# Altium PCB Power15V0_1A.PcbDoc
Units mm, origin at the board's own origin, x right, y up, seen from the top; angles counter-clockwise.
Board outline 93 x 54 mm, 2 copper layers (Top Layer, Bottom Layer); 39 components, 20 nets, 103 pads, 61 vias.
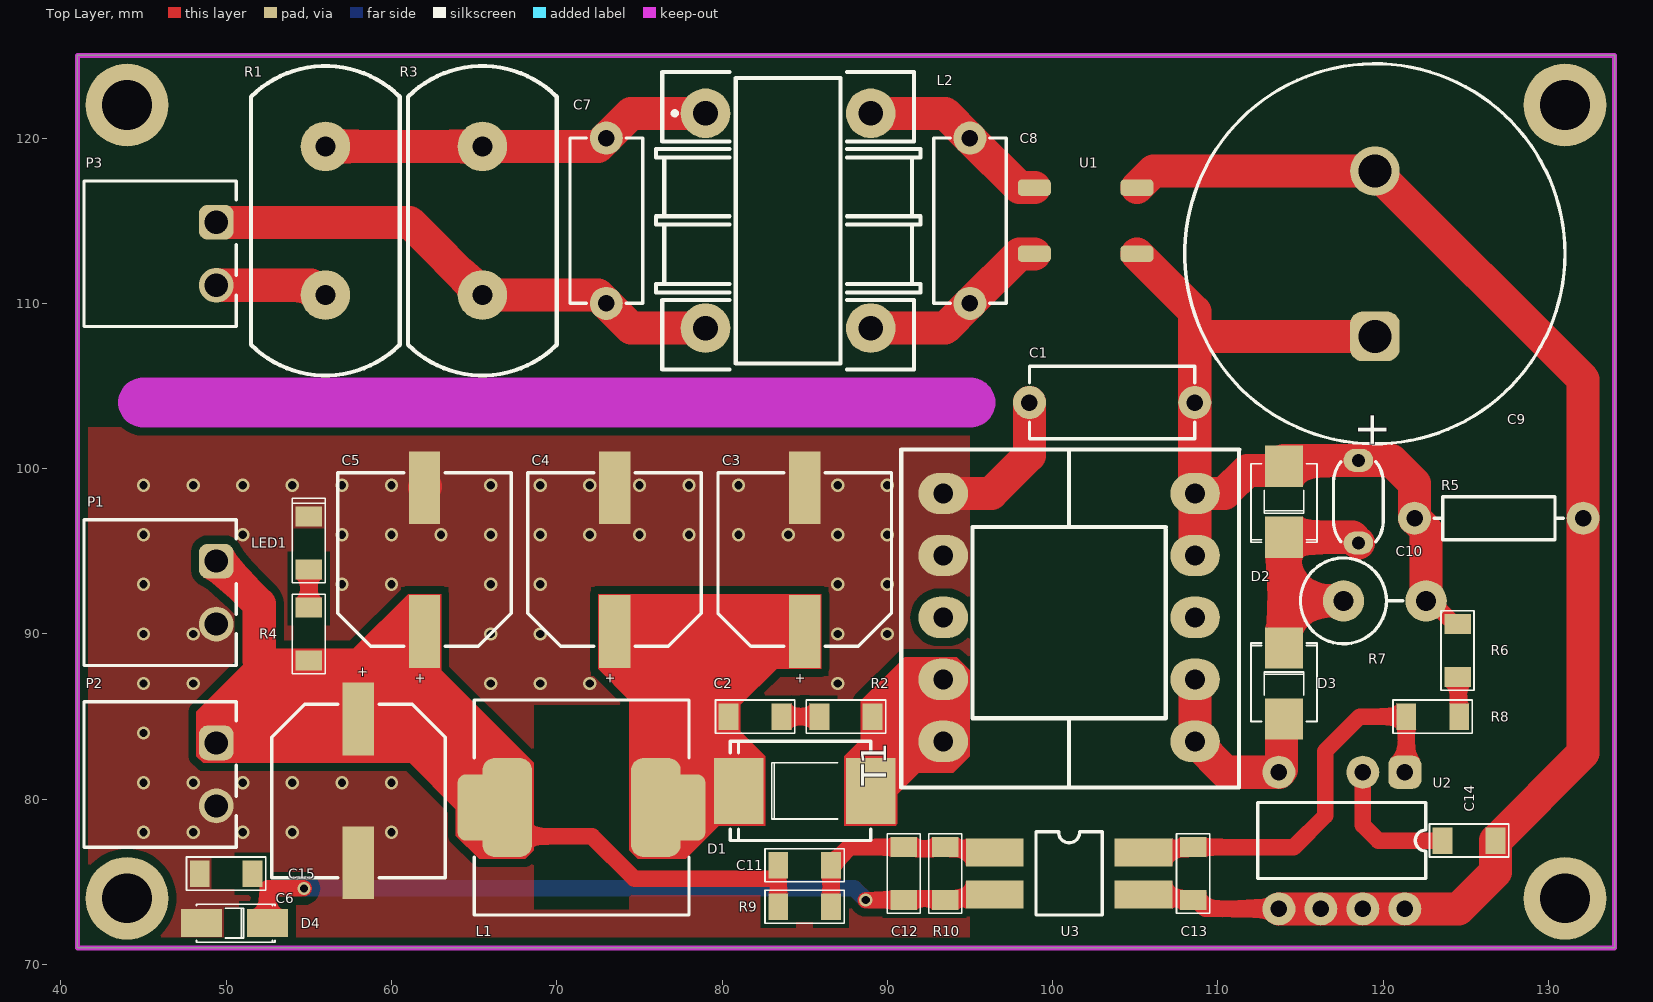
[diagram p0: Top Layer view]
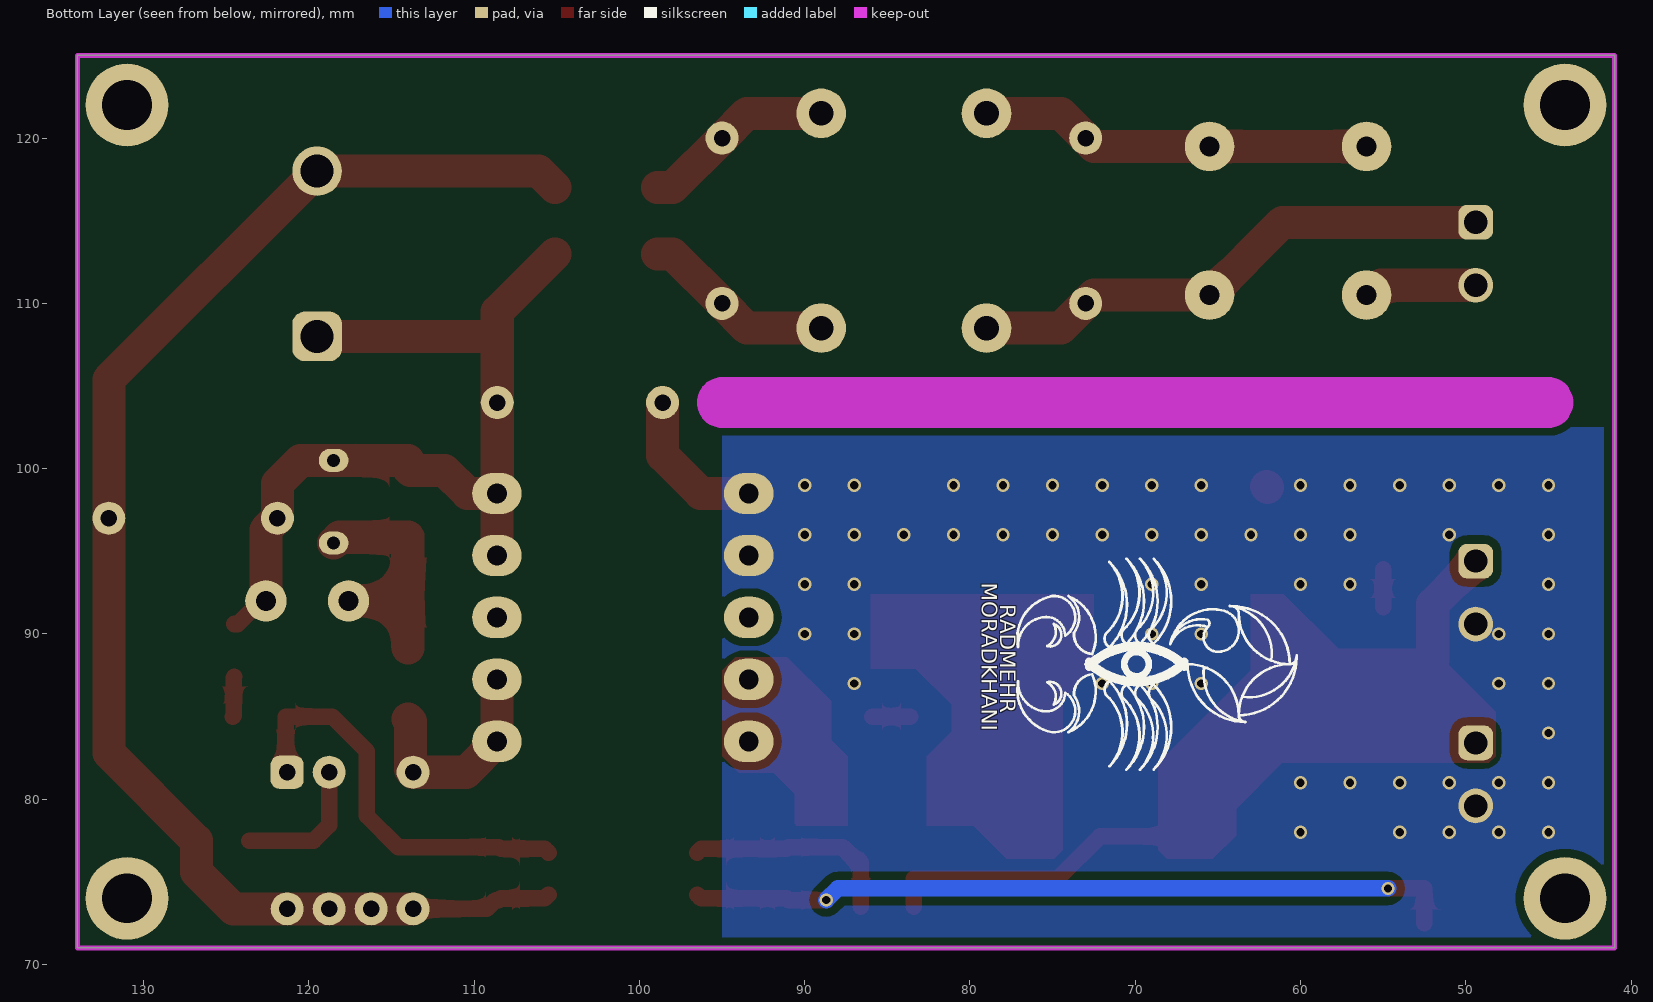
[diagram p1: Bottom Layer view, seen from below]
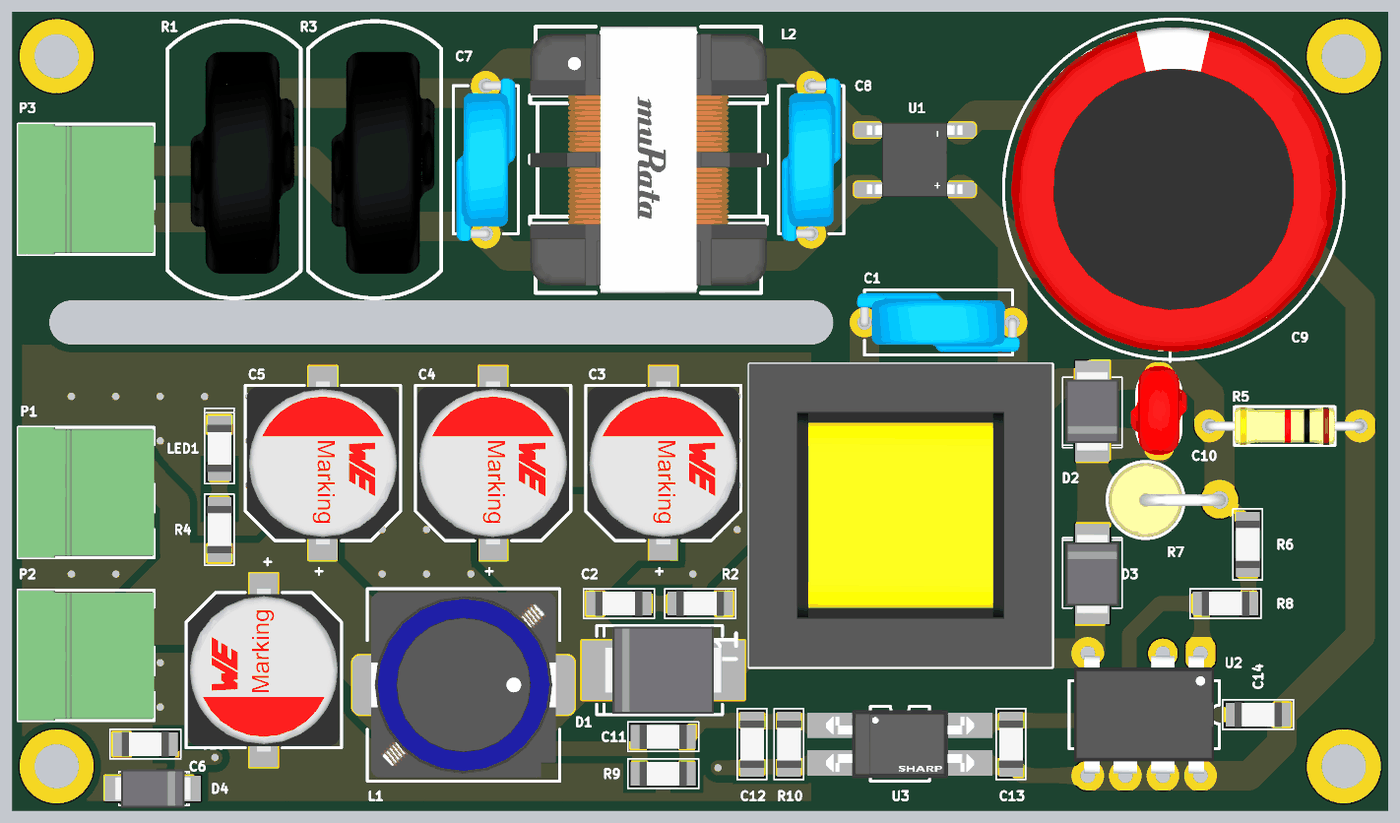
[diagram p2: 3D render of the assembled board from above, using the file's embedded part models]

## Layer stack, top to bottom
Top Solder: solder mask 0.0102, Solder Resist, Dk 3.5
Top Layer: signal copper 0.0356
Dielectric 1: dielectric 0.32, FR-4, Dk 4.8
Bottom Layer: signal copper 0.0356
Bottom Solder: solder mask 0.0102, Solder Resist, Dk 3.5

## Board outline
41,71 41,125 134,125 134,71
cut-out: 45,102.5 cw(c45,104) 45,105.5 95,105.5 cw(c95,104) 96.5,104 cw(c95,104) 95,102.5

## Design rules (kind name [scope] priority, off if disabled: settings)
Clearance [All] p1: gap=0.5 ignorepadtopadclearanceinfootprint=FALSE except(0: Arc-Hole Track-Hole SMDPad-Hole THPad-Hole Via-Hole Fill-Hole Poly-Hole Region-Hole Text-Hole)
PlaneConnect [All] p1: planeconnectstyle=Relief reliefexpansion=0.5 reliefentries=4 reliefconductorwidth=0.5 reliefairgap=0.5
PolygonConnect [All] p1: connectstyle=Direct reliefconductorwidth=1 reliefentries=4 polygonreliefangle="90 Angle" airgapwidth=1
RoutingVias [All] p1: holewidth=0.5 width=0.8 viastyle="Through Hole" minholewidth=0.5 minwidth=0.8 maxholewidth=0.5 maxwidth=0.8
SolderMaskExpansion [All] p1: expansion=0.102 istentingtop=FALSE
Width [All] p1: maxlimit=3 minlimit=1 preferedwidth=2 minimp=50.000000 maximp=50.000000 favimp=50.000000
29 further rules are at their usual default settings.

## Components (designator, comment, footprint, x,y, rotation, side; value= is the part's Value field where it differs from the comment)
C1 "CAP" CXY 103.6,104 r0 top
C2 "CAP_SMD" "C 1206" 82,85 r0 top
C3 "100µF" WCAP-AS5H_D10H10.5 85,94.5 r270 top
C4 "100µF" WCAP-AS5H_D10H10.5 73.5,94.5 r270 top
C5 "100µF" WCAP-AS5H_D10H10.5 62,94.5 r270 top
C6 "100µF" WCAP-AS5H_D10H10.5 58,80.5 r90 top
C7 "CAP" CXY 73,115 r90 top
C8 "CAP" CXY 95,115 r90 top
C9 "47µF" WCAP-AIG8_D22H26 119.5,113 r270 top
C10 "470nF" C_PLY_6X3 118.5,98 r90 top
C11 "CAP_SMD" "C 1206" 85,76 r0 top
C12 "CAP_SMD" "C 1206" 91,75.5 r270 top
C13 "CAP_SMD" "C 1206" 108.5,75.5 r90 top
C14 "CAP_SMD" "C 1206" 125.2,77.5 r180 top
C15 "CAP_SMD" "C 1206" 50,75.5 r180 top
D1 "DIOD_SMD" DIOD_SMC 85,80.5 r180 top
D2 "DIOD_SMD_ZENER" DIOD_SMB 114,98 r270 top
D3 "DIOD_SMD" DIOD_SMB 114,87 r90 top
D4 "DIOD_SMD_ZENER" DIOD_SMA 50.5,72.5 r0 top
L1 "Inductor" L_12*12_SMD 71.5,79.5 r180 top
L2 "EMI-FILTER" EMI-FILTER-10*13 84,115 r0 top
LED1 "LED_SMD" "D 1206" 55,95.5 r90 top
P1 "691322310002" 691322310002 46,92.5 r270 top
P2 "691322310002" 691322310002 46,81.5 r270 top
P3 "691322310002" 691322310002 46,113 r270 top
R1 "RTD" RTD 56,115 r90 top
R2 "RES_SMD" "R 1206" 87.5,85 r0 top
R3 "VARISTOR" RTD 65.5,115 r90 top
R4 "RES_SMD" "R 1206" 55,90 r270 top
R5 "10K" R025W_AX04 127,97 r180 top
R6 "RES_SMD" "R 1206" 124.5,89 r90 top
R7 "10K" R2W_AX_VER 120.1,92 r0 top
R8 "RES_SMD" "R 1206" 123,85 r0 top
R9 "RES_SMD" "R 1206" 85,73.5 r180 top
R10 "RES_SMD" "R 1206" 93.5,75.5 r90 top
T1 "EF20-10P" EF20-10P 101,91 r90 top
U1 "ABS210" ABS-4 102,115 r180 top
U2 "TNY2XX" PDIP-8C 117.5,77.5 r270 top
U3 "PC817" PSMD-4 101,75.5 r0 top

## Footprints (in the part's own frame and the unit in brackets; to place one, negate y for a bottom-side part, rotate by r counter-clockwise, add the part's x,y. Pads: shape width x height; smd on the part's side, far side on the other; paste and mask are expansions set on the pad)
691322310002 [mm] "Horizontal PCB Header, pitch 3.81mm, 02p"
  rrect50% 2.1x2.1 hole 1.4: 1(-1.905,3.4)
  round 2.1 hole 1.4: 2(1.905,3.4)
  silkscreen extent -4.4,-4.6 4.41,4.6, body extent -4.4,-4.6 4.41,4.6, height 7.25
ABS-4 [mm] "U?"
  rrect50% 2x1 smd: 1(-3.1,2) 2(-3.1,-2) 3(3.1,2) 4(3.1,-2)
  body extent -3.23,-2.5 3.23,2.5, height 1.61
"C 1206" [mm] "C?"
  rect 1.2x1.6 smd: 1(-1.6,0) 2(1.6,0)
  Top Layer pour cut-out: -0.9,0.95 0.9,0.95 0.9,-0.95 -0.9,-0.95
  silkscreen extent -2.4,-1 2.4,1, body extent -1.6,-0.83 1.6,0.83, height 0.57
C_PLY_6X3 [mm] "CAP, POLYESTER, 5.8X3.5mm pitch: 5.0mm"
  oval 1.4x1.8 hole 0.8: 1(-2.5,0) 2(2.5,0)
  silkscreen extent -2.42,-1.5 2.42,1.5, body extent -2.95,-1.9 3.05,1.9, height 8.5
CXY [mm] "CXY?"
  round 2 hole 1 paste-2539.97 mask+0: 1(-5,0) 2(5,0)
  silkscreen extent -5,-2.2 5,2.2, body extent -5.75,-2.1 5.75,2.1, height 0.25
"D 1206" [mm] "D?"
  rect 1.2x1.6 smd: 1(-1.6,0) 2(1.6,0)
  Top Layer pour cut-out: -0.9,0.95 0.9,0.95 0.9,-0.95 -0.9,-0.95
  silkscreen extent -2.4,-1 2.7,1, body extent -1.6,-0.83 1.6,0.83, height 0.57
DIOD_SMA [mm] "D?"
  rect 2.5x1.7 smd: 1(-2,0) 2(2,0)
  Top Layer pour cut-out: -0.65,0.95 0.65,0.95 0.65,-0.95 -0.65,-0.95
  silkscreen extent -2.3,-1.15 2.45,1.15, body extent -2.6,-1.3 2.6,1.3, height 2.42
DIOD_SMB [mm] "D?"
  rect 2.5x2.3 smd: 1(-2.15,0) 2(2.15,0)
  Top Layer pour cut-out: -0.8,1.25 0.8,1.25 0.8,-1.25 -0.8,-1.25
  silkscreen extent -2.3,-2 2.45,2, body extent -2.7,-1.8 2.7,1.8, height 2.32
DIOD_SMC [mm] "D?"
  rect 3x4 smd: 1(-4,0) 2(4,0)
  Top Layer pour cut-out: -2.4,2.1 2.4,2.1 2.4,-2.1 -2.4,-2.1
  silkscreen extent -4,-3 4.5,3, body extent -3.97,-2.95 3.98,2.95, height 2.32
EF20-10P [mm] "T?"
  oval 2.5x3 hole 1.2: 1(-7.5,-7.62) 2(-3.75,-7.62) 3(0,-7.62) 4(3.75,-7.62) 5(7.5,-7.62) 6(7.5,7.62) 7(3.75,7.62) 8(0,7.62) 9(-3.75,7.62) 10(-7.5,7.62)
  silkscreen extent -10.29,-10.29 10.16,10.16, body extent -10.29,-10.29 10.21,10.21, height 14.08
EMI-FILTER-10*13 [mm] "L?"
  round 3 hole 1.5 paste-2539.97 mask+0: 1(-5,6.5) 2(-5,-6.5) 3(5,-6.5) 4(5,6.5)
  silkscreen extent -8,-9 8,9, body extent -8,-9 8,9, height 17.76
L_12*12_SMD [mm] "L?"
  rrect50% 2x4 smd: 1(-6.5,0) 2(6.5,0)
  rrect50% 3x6 smd: 1(-4.5,0) 2(4.5,0)
  Top Layer pour cut-out: -2.9,6.2 2.9,6.2 2.9,-6.2 -2.9,-6.2
  silkscreen extent -6.5,-6.5 6.5,6.5, body extent -6.25,-6.25 6.25,6.25, height 7.86
PDIP-8C [mm] "U?"
  rrect50% 2x2 hole 1: 1(-4.13,3.81)
  round 2 hole 1: 2(-4.13,1.27) 4(-4.13,-3.81) 5(4.13,-3.81) 6(4.13,-1.27) 7(4.13,1.27) 8(4.13,3.81)
  silkscreen extent -2.29,-5.08 2.3,5.08, body extent -3.96,-4.72 3.96,4.72, height 4.08
PSMD-4 [mm] "U?"
  rect 3.5x1.7 smd paste+0 mask+0: 1(-4.5,1.27) 2(-4.5,-1.27) 3(4.5,-1.27) 4(4.5,1.27)
  Top Layer pour cut-out: -2.5,2.5 2.5,2.5 2.5,-2.5 -2.5,-2.5
  silkscreen extent -2,-2.5 2,2.54, body extent -5.3,-2.64 5.3,2.64, height 0.25
R2W_AX_VER [mm] "RESISTOR 2 WATT, AXIAL0.8"
  round 2.5 hole 1.2: 1(-2.5,0) 2(2.5,0)
  silkscreen extent -5.1,-2.6 1.1,2.6, body extent -5,-2.5 2.9,2.5, height 20.3
R025W_AX04 [mm] "RESISTOR 1/4 WATT, AXIAL0.4"
  round 2 hole 1: 1(-5.1,0) 2(5.1,0)
  silkscreen extent -3.9,-1.3 3.9,1.3, body extent -5.38,-1.28 5.38,1.28, height 2.6
"R 1206" [mm] "R?"
  rect 1.2x1.6 smd: 1(-1.6,0) 2(1.6,0)
  Top Layer pour cut-out: -0.9,0.95 0.9,0.95 0.9,-0.95 -0.9,-0.95
  silkscreen extent -2.4,-1 2.4,1, body extent -1.6,-0.83 1.6,0.83, height 0.57
RTD [mm] "R?"
  round 3 hole 1.2: 1(-4.5,0) 2(4.5,0)
  silkscreen extent -9.36,-4.5 9.36,4.5, body extent -7.7,-4.06 7.3,2.94, height 22.5
WCAP-AIG8_D22H26 [mm] "Aluminium Electrolytic Snap-In Capacitors, 22x26mm"
  rrect50% 3x3 hole 2: 1(5,0)
  round 3 hole 2: 2(-5,0)
  silkscreen extent -11.5,-11.5 11.5,11.5, body extent -10.96,-11 11,11, height 26.09
WCAP-AS5H_D10H10.5 [mm] "Aluminum Electrolytic Capacitors, 10x10.5mm"
  rect 4.4x1.9 smd: 1(4.35,0) 2(-4.35,0)
  silkscreen extent -5.25,-5.25 5.25,5.25, body extent -5.5,-5.15 5.5,5.15, height 10.5

## Part data
C3 C4 C5 C6: library part 865230657013, "WCAP-AS5H Aluminum Electrolytic Capacitor, V-Chip, D10 x H10.5mm, 100µF, 50V", Capacitance Tolerance=+/-20%, Leakage Current=50µA, Manufacturer="Wurth Elektronik", Operating Temperature Max=105°C, Operating Temperature Min=-40°C, Rated Voltage (DC)=50V, Ripple Current=160mA, Capacitance=100µF, Category="Aluminum Electrolytic Capacitors", ComponentLink1Description="Website Link", ComponentLink1URL=https://www.we-online.com/redexpert/article/865230657013?ad, ComponentLink2Description="Datasheet Link", ComponentLink2URL=https://www.we-online.com/redexpert/spec/865230657013?ad, Diameter=10mm, Dissipation Factor=12%, Endurance=5000h, Height=10.5mm, Manufacturer Part Number=865230657013, Match Code=WCAP-AS5H, Mount="Surface Mount", Packaging="Tape and Reel", Technical Reference=ASDF105101M050DVCTEE000
C9: library part 861011483001, "WCAP-AIG8 Aluminum Electrolytic Capacitor, Snap-In, D22 x H26mm, 47µF, 450V", Capacitance Tolerance=+/-20%, Leakage Current=423µA, Manufacturer="Wurth Elektronik", Operating Temperature Max=85°C, Operating Temperature Min=-25°C, Rated Voltage (DC)=450V, Ripple Current=360mA, Capacitance=47µF, Category="Aluminum Electrolytic Capacitors", ComponentLink1Description="Website Link", ComponentLink1URL=https://www.we-online.com/redexpert/article/861011483001?ad, ComponentLink2Description="Datasheet Link", ComponentLink2URL=https://www.we-online.com/redexpert/spec/861011483001?ad, Diameter=22mm, Dissipation Factor=20%, Endurance=2000h, Height=26mm, Manufacturer Part Number=861011483001, Match Code=WCAP-AIG8, Mount="Through Hole", Packaging=Tray, Technical Reference=ANAN260470M450DSIC3B000
C10: library part CAP_THD_FILM_POLYESTER, "CAP, FILM,", ASSEMBLY=ASSEMBLY, DESC="CAP, FILM,", MANF=MANF, MANF_P#=MANF_PART#, PARAM2=400V, Price="100= 1$"
P1 P2 P3: "WR-TBL Series 322 Horizontal PCB Header, Through Hole, pitch 3.81mm, 2p", Manufacturer="Wurth Elektronik", Operating Temperature Max=105°C, Operating Temperature Min=-40°C, Rated Current=10A, Working Voltage=300V, Application=Pluggable, Category="Terminal Blocks", ComponentLink1Description="Manufacturer Link", ComponentLink1URL=https://www.we-online.com/redexpert/article/691322310002?ad, ComponentLink2Description=Datasheet, ComponentLink2URL=https://www.we-online.com/redexpert/spec/691322310002?ad, Manufacturer Part Number=691322310002, Match Code=WR-TBL, Modularity=No, Mount="Through Hole", Orientation=Horizontal, Packaging=Box, PCB/Cable/Panel=PCB, Pin Number=2, Pitch=3.81mm
R5 R7: library part RES_THD, "RESISTOR, THD", ASSEMBLY=ASSEMBLY, DESC=DESCRIPTION, DIST#=MOUSER, MANF="KOA SPEER", MANF_P#=RK73H1ETTP4701F, PARAM=0.063W, PARAM2=1%, Price="100= 0.5$"
U2: "P Package (DIP-8C) / G Package (SMD-8C)"

## Free pads (board coordinates)
  round 5 hole 3: ""(44,74) ""(44,122) ""(131,74) ""(131,122)

## Via types
v1: diameter 0.8/0.8 (per signal layer), hole 0.5, Top Layer to Bottom Layer, tented both sides, 59 vias
v2: diameter 0.8, hole 0.5, Top Layer to Bottom Layer, tented both sides, 2 vias

## Nets (pads, with @x,y where several pads share a name; then routed paths per layer and width w, separated by ;. In a path a pad name is that pad's centre, name@x,y a point inside that pad or via, vN(x,y) a via of type N, cw(c..) or ccw(c..) an arc to the next point about the centre after c; other vN are vias at no path point)
FB_BIAS: C13.2 R8.1 U2.1 U3.4 | length 25.1
  Top Layer w1: U3.4 105.73,77 108.4,77 C13.2 114.6,77.1 116.5,79 116.5,82.914 118.586,85 121.3,85 R8.1@121.31,84.81 ; U2.1 121.4,82.13 R8.1
FB_OUT: C5.1 C6.1 C11.1 L1.2 P1.1 P2.1 R4.2 R9.2 | length 30.4
  Top Layer w1: 52,88.4 R4.2 ; L1.2@67,79.5 67,78.731 67.981,77.75 72.136,77.75 74.686,75.2 83.4,75.2 R9.2
  Top Layer w2: P1.1 52,91.805 52,88.4
GND: C1.1 C3.2 C4.2 C5.2 C6.2 C15.2 D4.1 LED1.2 P1.2 P2.2 T1.6 T1.7 | length 9.5
  Top Layer w2: C5.2 62,98.875 C5.2@62.05,98.925 ; T1.6 96.3,98.5 98.6,100.8 C1.1
  other v1: 45,78 48,78 51,78 54,78 60,78 45,81 48,81 51,81 54,81 57,81 60,81 45,84 45,87 48,87 66,87 69,87 72,87 87,87 45,90 48,90 66,90 69,90 87,90 90,90 45,93 57,93 60,93 66,93 69,93 87,93 90,93 45,96 51,96 57,96 60,96 63,96 66,96 69,96 72,96 75,96 78,96 81,96 84,96 87,96 90,96 45,99 48,99 51,99 54,99 57,99 60,99 66,99 69,99 72,99 75,99 78,99 81,99 87,99 90,99
GNDP: C9.2 C13.1 C14.1 R5.1 U1.2 U2.5 U2.6 U2.7 U2.8 U3.3 | length 87.2
  Top Layer w1: U3.3 105.73,74 108.4,74 C13.1 108.7,73.9 109.23,73.37 U2.5
  Top Layer w2: U1.2 106.1,118 C9.2 132.1,105.4 R5.1 132.1,82.8 C14.1 126.8,75.6 124.57,73.37 U2.8 U2.7 U2.6 U2.5
NetC1_2: C1.2 C9.1 C10.2 D2.1 R5.2 R6.2 R7.2 T1.4 T1.5 U1.1 | length 54.9
  Top Layer w1: R7.2@122.587,91.713 123.187,91.713 124.3,90.6 R6.2
  Top Layer w2: U1.1 108.6,109.5 108.6,108 ; T1.4 T1.5 110.4,98.5 111.8,99.9 113.85,99.9 114,100.05 D2.1 D2.1@114,100.4 ; T1.5@108.62,99.001 108.6,99.021 C1.2 108.6,108 ; D2.1@114,100.5 C10.2 120.5,100.5 121.9,99.1 R5.2 122.6,96.3 R7.2 R7.2@122.504,92.096 ; C9.1 108.6,108
NetC2_1: C2.1 C3.1 C4.1 D1.2 L1.1
NetC2_2: C2.2 R2.1 | length 2.3
  Top Layer w1: C2.2 R2.1
NetC7_1: C7.1 L2.2 P3.1 R3.1 | length 32.3
  Top Layer w2: P3.1 61.095,114.905 R3.1 72.5,110.5 C7.1 74.5,108.5 L2.2
NetC7_2: C7.2 L2.1 R1.2 R3.2 | length 23.8
  Top Layer w2: R1.2 R3.2 72.5,119.5 C7.2 74.5,121.5 L2.1
NetC8_1: C8.1 L2.3 U1.3 | length 11.8
  Top Layer w2: L2.3 93.5,108.5 C8.1 98,113 U1.3
NetC8_2: C8.2 L2.4 U1.4 | length 11.8
  Top Layer w2: L2.4 93.5,121.5 C8.2 98,117 U1.4
NetC10_1: C10.1 D2.2 D3.2 R7.1 | length 15.9
  Top Layer w1: D2.2@113.5,95.5 D2.2@113.5,95.85 ; D2.2@113.5,96 D2.2@113.5,95.85 ; D2.2@113.85,95.5 D2.2@113.5,95.85
  Top Layer w2: D3.2 114,92 ; R7.1 114,92 ; C10.1 118.15,95.85 D2.2 114,92
NetC11_2: C11.2 C12.1 R9.1 R10.2 U3.1 | length 13.1
  Top Layer w1: R9.1 C11.2 86.6,76.2 86.7,76.3 86.9,76.3 87.7,77.1 C12.1 91.1,77 96.27,77 U3.1
NetC12_2: C12.2 C15.1 D4.2 R10.1 U3.2 | length 46.5
  Top Layer w1: D4.2 52.5,74.6 v2(54.7,74.6) ; v2(88.7,73.9) C12.2 91.1,74 96.27,74 U3.2
  Bottom Layer w1: v2(54.7,74.6) 88,74.6 v2(88.7,73.9)
NetC14_2: C14.2 U2.2 | length 8.4
  Top Layer w1: U2.2 118.77,78.43 119.7,77.5 C14.2
NetD1_1: D1.1 R2.2 T1.9 T1.10
NetD3_1: D3.1 T1.1 T1.2 U2.4 | length 13.1
  Top Layer w1: D3.1@113.5,85 D3.1@113.595,84.905
  Top Layer w2: T1.2 T1.1 110.49,81.63 U2.4 113.85,81.79 113.85,84.7 D3.1
NetLED1_1: LED1.1 R4.1 | length 2.3
  Top Layer w1: R4.1 LED1.1
NetP3_2: P3.2 R1.1 | length 6.8
  Top Layer w2: P3.2 55.134,111.095 55.729,110.5 R1.1
NetR6_1: R6.1 R8.2 | length 2.4
  Top Layer w1: R6.1 124.55,87.35 124.55,85.05 R8.2
pads on no net: T1.3 T1.8

## Polygon pours and split planes (outlines as drawn)
GND on Top Layer "NONET_L-01_P-001" (solid, remove dead copper, pour order 0): 41,102.5 95,102.5 95,71 41,71
GND on Bottom Layer "NONET_L-01_P-001" (solid, remove dead copper, pour order 2): 41,102.5 95,102.5 95,71 41,71

## Keep-outs
Keep-Out Layer:
  lines w0.3: 41,71 134,71 134,125 41,125 41,71
  lines w3: 45,104 95,104

## Other copper
Top Layer:
  pour cut-out: 41,125 134,125 134,102.5 41,102.5
  region net FB_OUT: 48.2,85.3 52,89.1 57.7,89.1 61,92.4 63,92.4 63,87.8 68.6,82.2 68.6,76.9 68.1,76.4 65.3,76.4 63.9,77.8 63.9,79.4 61.1,82.2 48.6,82.2 48.2,82.6
  pour cut-out: 95,102.5 134,102.5 134,71 95,71
  region net NetD1_1: 88.4,85.95 91.05,88.6 94.2,88.6 95,87.8 95,82.6 94,81.6 91.9,81.6 90.6,80.3 90.6,78.5 90.5,78.4 87.4,78.4 87.4,82.6 88.4,83.6
  region net NetC2_1: 72.5,92.4 86,92.4 86,87.9 83.3,87.9 81.1,85.7 81.1,84.1 82.6,82.6 82.6,78.4 79.8,78.4 77.8,76.4 74.9,76.4 74.4,76.9 74.4,86 72.5,87.9
Bottom Layer:
  pour cut-out: 41,125 134,125 134,102.5 41,102.5
  pour cut-out: 95,102.5 134,102.5 134,71 95,71

## Silkscreen, mask and mechanical layers (free items; w line width, h text height)
Bottom Overlay:
  circle w0.412: c69.918,88.171 r0.741
  lines w0.162: 60.22,88.709 ccw(c63.123,89.1) 63.515,86.197 ; 61.766,88.397 cw(c64.67,88.788) 64.278,91.691 ; 65.613,90.411 cw(c66.23,88.764) 67.878,89.382 ; 65.841,87.965 cw(c62.937,87.574) 63.328,84.67 ; 75.023,84.047 cw(c74.931,85.346) 74.241,86.451 ccw(c75.384,86.456) 75.39,85.313 ccw(c75.33,87.072) 77.089,87.131 cw(c74.514,86.622) 75.023,84.047 ; 60.651,88.171 cw(c60.651,88.583) 60.24,88.583 ccw(c63.74,88.583) 63.74,85.082 ; 60.651,88.171 cw(c60.651,85.082) 63.74,85.082 ; 60.651,88.171 ccw(c60.651,91.26) 63.74,91.26 cw(c64.152,91.26) 64.152,91.672 ccw(c64.152,88.171) 60.651,88.171 ; 63.328,84.67 ccw(c63.328,85.082) 63.74,85.082 ; 63.328,84.67 ccw(c63.328,88.171) 66.829,88.171 ; 63.74,85.082 cw(c66.829,85.082) 66.829,88.171 ; 66.829,88.171 ccw(c69.918,91.26) 73.007,88.171 ccw(c69.918,85.082) 66.829,88.171 ; 67.878,89.382 ccw(c66.002,88.973) 65.594,90.848 ccw(c65.822,90.636) 65.61,90.408 cw(c65.002,89.789) 64.987,88.921 cw(c64.998,90.189) 64.789,91.441 cw(c65.304,88.867) 67.878,89.382 ; 68.888,81.787 cw(c71.462,84.361) 68.888,86.935 cw(c68.58,86.421) 69.094,86.112 ccw(c71.154,83.847) 68.888,81.787 ; 68.888,89.407 ccw(c68.58,89.921) 69.094,90.23 cw(c71.154,92.495) 68.888,94.555 ccw(c71.462,91.981) 68.888,89.407 ; 69.712,81.787 cw(c72.286,84.361) 69.712,86.935 cw(c69.403,86.421) 69.918,86.112 ccw(c71.977,83.847) 69.712,81.787 ; 69.712,89.407 ccw(c69.403,89.921) 69.918,90.23 cw(c71.977,92.495) 69.712,94.555 ccw(c72.286,91.981) 69.712,89.407 ; 70.536,81.787 cw(c73.11,84.361) 70.536,86.935 cw(c70.227,86.421) 70.742,86.112 ccw(c72.801,83.847) 70.536,81.787 ; 70.536,89.407 ccw(c70.227,89.921) 70.742,90.23 cw(c72.801,92.495) 70.536,94.555 ccw(c73.11,91.981) 70.536,89.407 ; 71.565,81.993 cw(c74.14,84.567) 71.565,87.141 cw(c71.257,86.627) 71.771,86.318 ccw(c73.831,84.052) 71.565,81.993 ; 71.565,89.201 ccw(c71.257,89.715) 71.771,90.024 cw(c73.831,92.289) 71.565,94.349 ccw(c74.14,91.775) 71.565,89.201 ; 72.595,87.553 cw(c72.513,86.359) 73.707,86.276 ccw(c74.984,85.329) 74.037,84.052 cw(c75.066,86.524) 72.595,87.553 ; 72.595,88.789 ccw(c72.513,89.983) 73.707,90.065 cw(c74.984,91.013) 74.037,92.289 ccw(c75.066,89.818) 72.595,88.789 ; 74.241,89.891 cw(c75.384,89.886) 75.39,91.029 cw(c75.33,89.27) 77.089,89.211 ccw(c74.514,89.72) 75.023,92.295 ccw(c74.931,90.996) 74.241,89.891 ; 74.514,86.622 ccw(c75.161,86.382) 74.921,85.734 cw(c75.794,86.198) 75.33,87.072 ccw(c75.147,86.438) 74.514,86.622 ; 74.514,89.72 ccw(c75.147,89.904) 75.33,89.27 cw(c75.794,90.144) 74.921,90.608 ccw(c75.161,89.96) 74.514,89.72
  lines w0.486: 67.035,88.006 cw(c69.918,85.123) 72.801,88.006 ; 67.035,88.336 ccw(c69.918,91.219) 72.801,88.336
  text "MORADKHANI" at 79.627,93.094 h1.62 r90
  text "RADMEHR" at 78.512,91.81 h1.62 r90

## Text inside footprints (layer, text, board x,y; h text height)
C3: Top Overlay "+" at 84.5,87.65 h0.6 r270
C4: Top Overlay "+" at 73,87.65 h0.6 r270
C5: Top Overlay "+" at 61.5,87.65 h0.6 r270
C6: Top Overlay "+" at 58.5,87.35 h0.6 r90
C9: Top Overlay "+" at 118.5,103.5 h2 r270